# Altium PCB MCU_BMA_V1_0.PcbDoc
Units mm, origin at the board's own origin, x right, y up, seen from the top; angles counter-clockwise.
Board outline 47 x 47 mm, 2 copper layers (Top Layer, Bottom Layer), stack 1.571 mm thick; 35 components, 29 nets, 190 pads, 60 vias.
Unrouted connection lines stored in the file: 46.
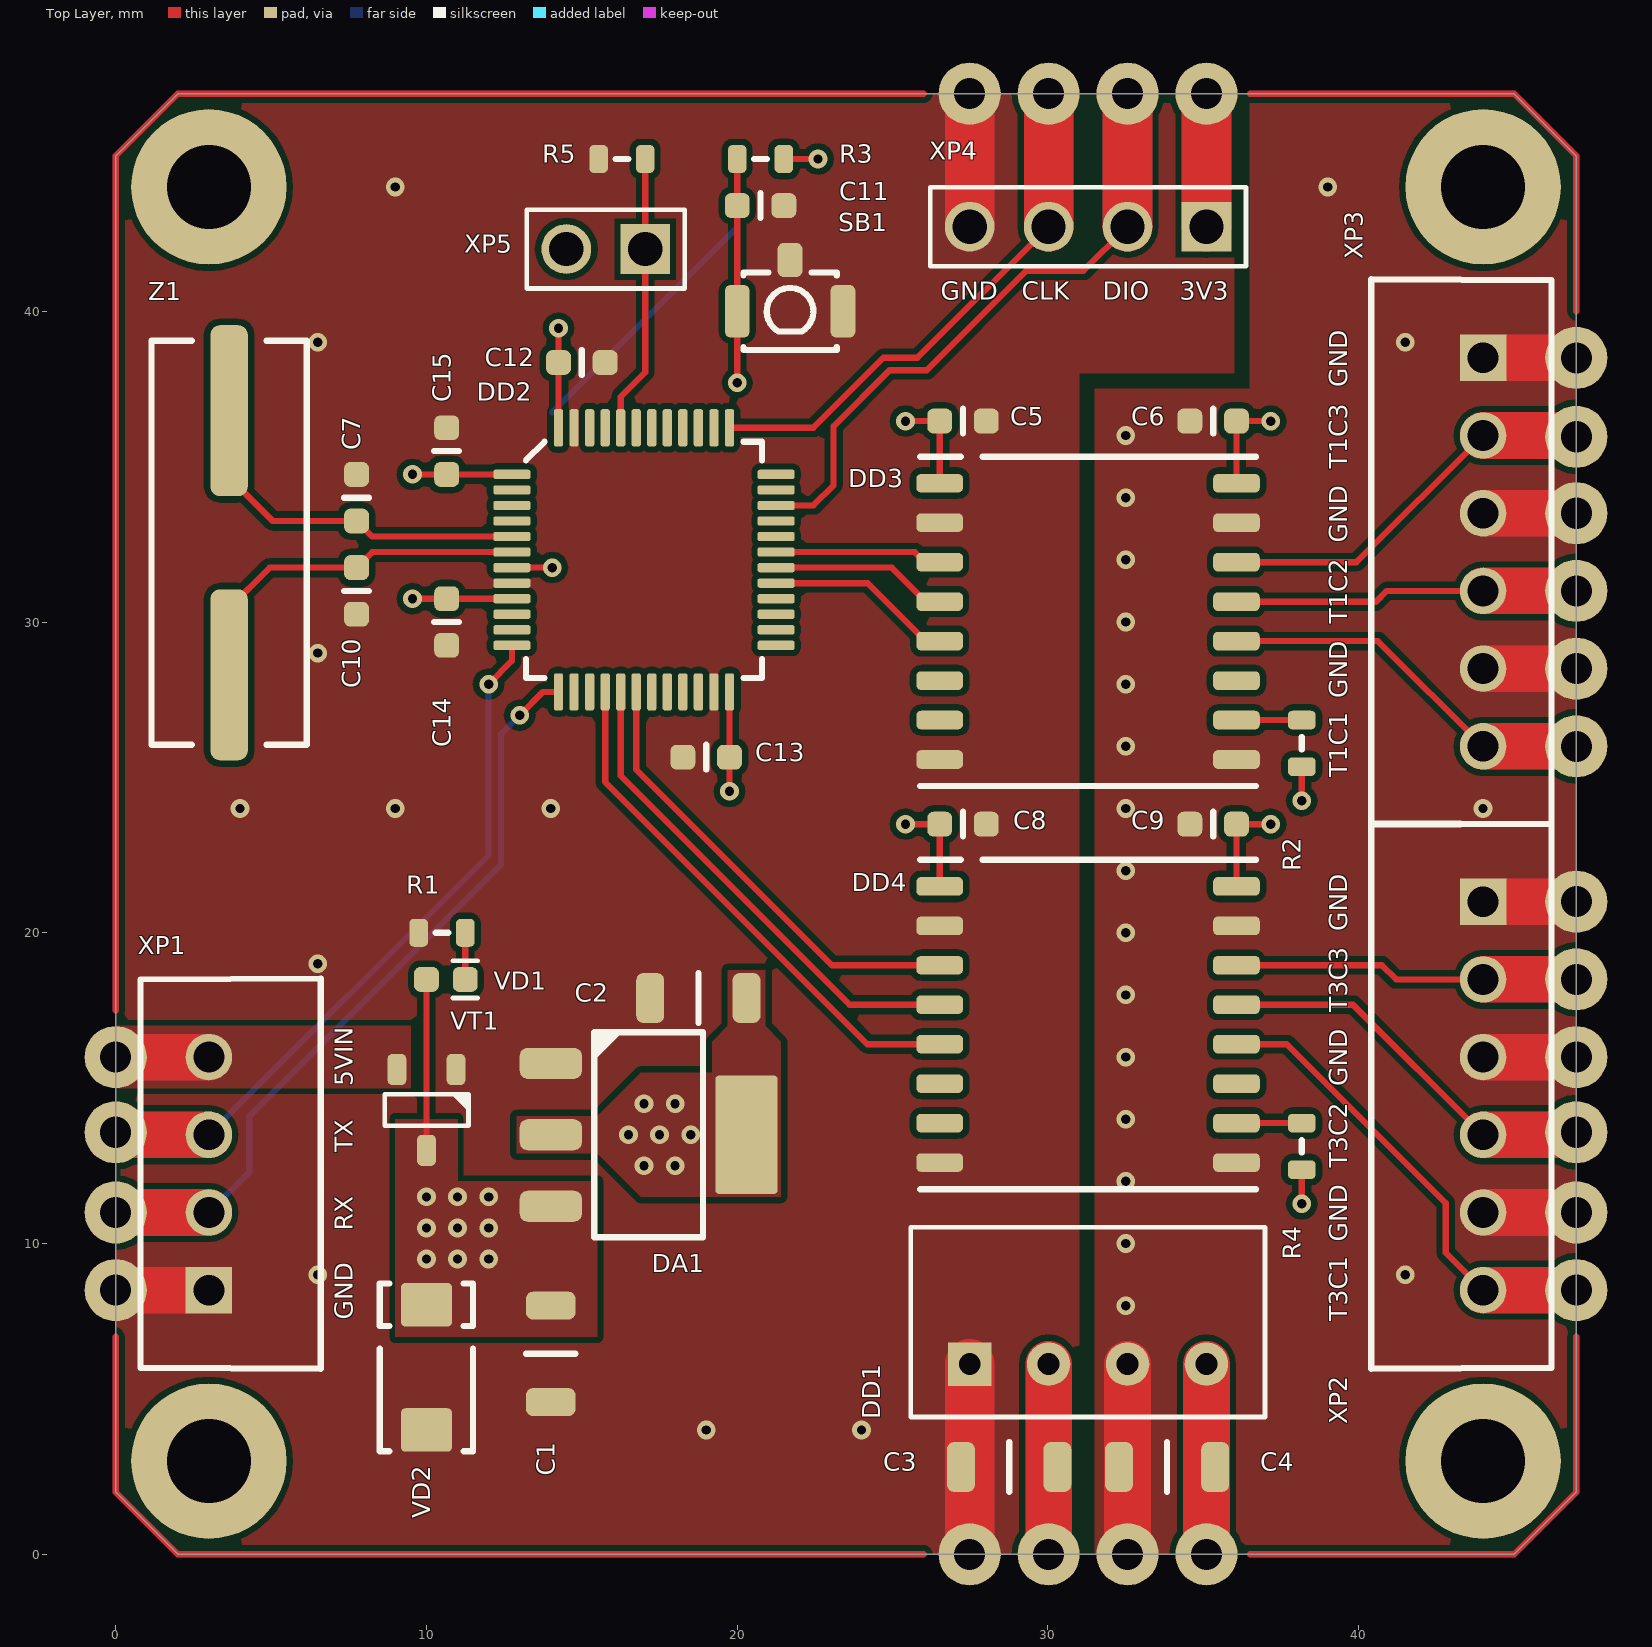
[diagram p0: Top Layer view]
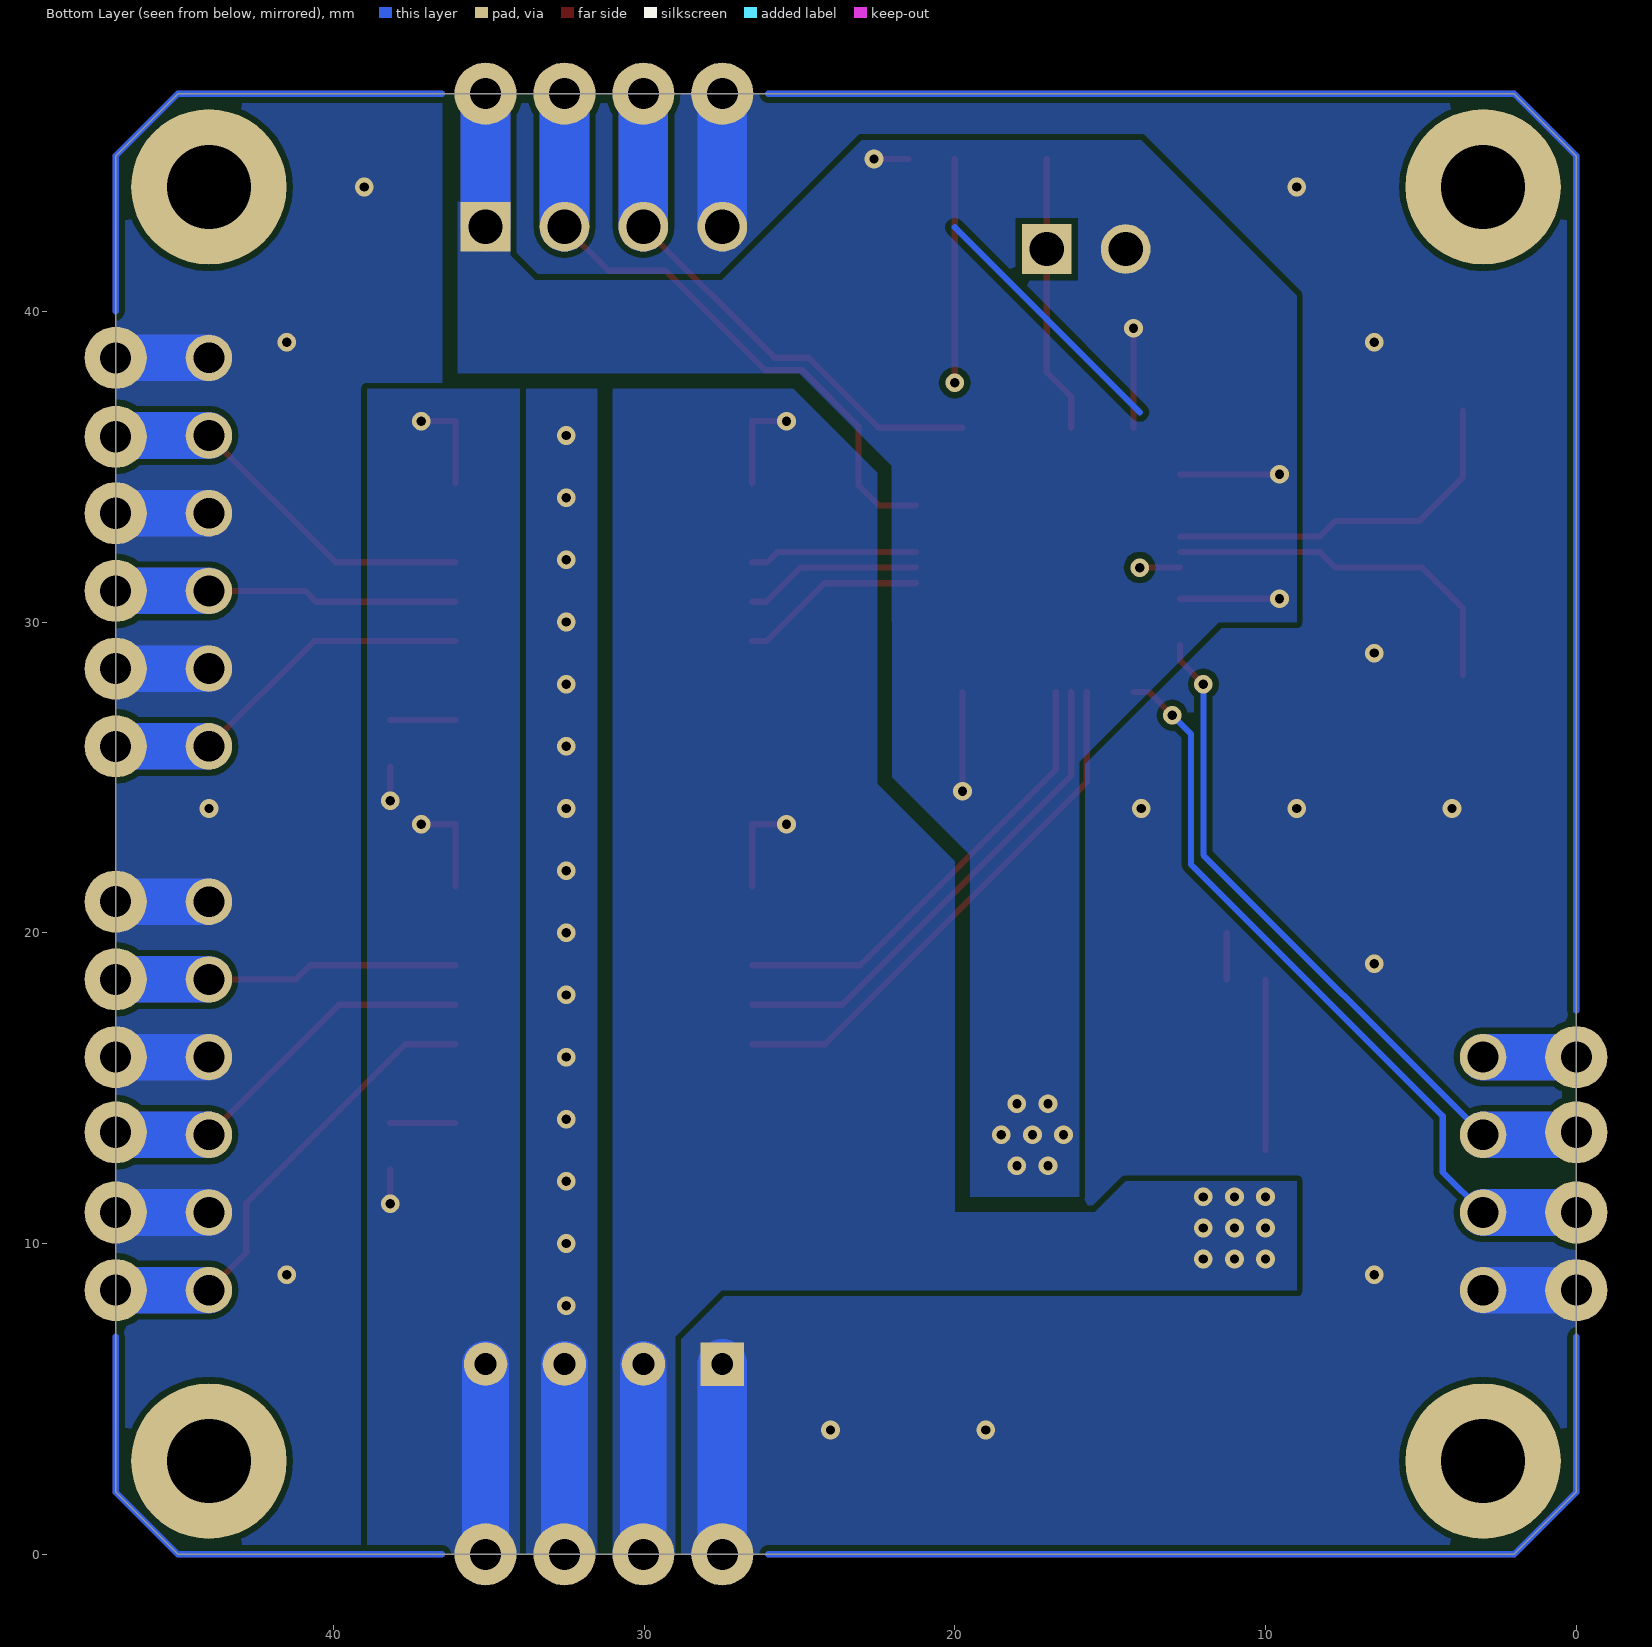
[diagram p1: Bottom Layer view, seen from below]

## Layer stack, top to bottom
Top Solder: solder mask 0.0102, Solder Resist, Dk 3.5
Top Layer: signal copper 0.0356
Dielectric 1: core 1.5, FR4, Dk 4.6
Bottom Layer: signal copper 0.0356
Bottom Solder: solder mask 0.0102, Solder Resist, Dk 3.5

## Board outline
0,2 0,45 2,47 45,47 47,45 47,2 45,0 2,0

## Design rules (kind name [scope] priority, off if disabled: settings)
Clearance [All] p1: gap=0.2 ignorepadtopadclearanceinfootprint=FALSE except(0: Arc-Hole Track-Hole SMDPad-Hole THPad-Hole Via-Hole Fill-Hole Poly-Hole Region-Hole Text-Hole)
ComponentClearance [All] p1: gap=0 collisioncheckmode=3 verticalgap=0 showdistances=FALSE
PlaneConnect [All] p1: planeconnectstyle=Direct reliefexpansion=0.508 reliefentries=4 reliefconductorwidth=0.254 reliefairgap=0.254
PolygonConnect [All] p1: connectstyle=Direct reliefconductorwidth=0.254 reliefentries=4 polygonreliefangle="90 Angle" airgapwidth=0.254
RoomDefinition main [InComponentClass('main')] p1 off: confinementstyle=ConfineIn formatcopy=TRUE lockcomponents=FALSE outline 77.943,-13.949 246.853,-13.949 246.853,3.069 77.943,3.069
RoutingVias [All] p1: holewidth=0.3 width=0.6 viastyle="Through Hole" minholewidth=0.3 minwidth=0.6 maxholewidth=1 maxwidth=2
SolderMaskExpansion [All] p1: expansion=0.102 istentingtop=FALSE
Width [All] p1: maxlimit=10 minlimit=0.2 preferedwidth=0.2
28 further rules are at their usual default settings.

## Components (designator, comment, footprint, x,y, rotation, side; value= is the part's Value field where it differs from the comment)
C1 "10 мкФ" C1206C 14,6.45 r270 top
C2 "10 мкФ" C1206C 18.75,17.9 r180 top
C3 "10 мкФ" C1206C 28.75,2.81 r180 top
C4 "10 мкФ" C1206C 33.83,2.81 r180 top
C5 "0,1 мкФ" C0603C 27.265,36.465 r0 top
C6 "0,1 мкФ" C0603C 35.315,36.465 r180 top
C7 "20 пФ" C0603C 7.75,34 r270 top
C8 "0,1 мкФ" C0603C 27.265,23.495 r0 top
C9 "0,1 мкФ" C0603C 35.315,23.495 r180 top
C10 "20 пФ" C0603C 7.75,31 r90 top
C11 "0,1 мкФ" C0603C 20.75,43.4 r0 top
C12 "0,1 мкФ" C0603C 15,38.35 r0 top
C13 "0,1 мкФ" C0603C 19,25.65 r180 top
C14 "0,1 мкФ" C0603C 10.65,30 r270 top
C15 "0,1 мкФ" C0603C 10.65,35.5 r90 top
DA1 "LD1117S33TR" SOT-223 20.3,13.5 r270 top
DD1 "TME 0505S" TME-1W-SINGLE 27.48,6.12 r0 top
DD2 "STM32F030C8T6TR" LQFP48 17,32 r0 top
DD3 "ADUM1400ARWZ-RL" SOIC-Wide-16 31.29,30.02 r0 top
DD4 "ADUM1400ARWZ-RL" SOIC-Wide-16 31.29,17.05 r0 top
R1 "130 Ом" C0603R 10.5,20 r180 top
R2 "10 кОм" C0603R 38.165,26.095 r270 top
R3 "10 кОм" C0603R 20.75,44.9 r180 top
R4 "10 кОм" C0603R 38.165,13.125 r270 top
R5 "10 кОм" C0603R 16.29,44.9 r0 top
SB1 "B3U-1100PB" B3U-1100P 21.7,40 r180 top
VD1 "KPH-1608SGC" LED_0603 10.625,18.5 r180 top
VD2 "SMAJ5.0A" DO-214AC 10,6.015 r270 top
VT1 "IRLML2244TRPBF" SOT23-3 10,14.3 r180 top
XP1 "DS1069-4 M" "DS1069-4 M" 3,8.5 r90 top
XP2 "DS1069-6 M" "DS1069-6 M" 44,21 r270 top
XP3 "DS1069-6 M" "DS1069-6 M" 44,38.5 r270 top
XP4 "PLS-4" PLS-4 31.29,42.72 r180 top
XP5 "PLS-2" PLS-2 15.77,42 r180 top
Z1 "8 МГц" HC-49SM 3.65,32.55 r90 top

## Footprints (in the part's own frame and the unit in brackets; to place one, negate y for a bottom-side part, rotate by r counter-clockwise, add the part's x,y. Pads: shape width x height; smd on the part's side, far side on the other; paste and mask are expansions set on the pad)
B3U-1100P [mm]
  rrect50% 0.8x1.7 smd: 1(-1.7,0) 2(1.7,0)
  rrect50% 0.8x1.1 smd: 3(0,-1.65)
  silkscreen extent -1.5,-1.25 1.5,1.25, body extent -2,-1.95 2,1.25, height 1.75
C0603C [mm]
  rrect50% 0.8x0.8 smd: 1(-0.75,0) 2(0.75,0)
  silkscreen extent 0,-0.4 0,0.4, body extent -0.8,-0.4 0.8,0.4, height 0.95
C0603R [mm]
  rrect50% 0.6x0.9 smd: 1(-0.75,0) 2(0.75,0)
  silkscreen extent -0.2,0 0.2,0, body extent -0.8,-0.4 0.8,0.4, height 0.44
C1206C [mm]
  rrect50% 0.9x1.6 smd: 1(-1.55,0) 2(1.55,0)
  silkscreen extent 0,-0.8 0,0.8, body extent -1.6,-0.8 1.6,0.8, height 1.3
DO-214AC [mm]
  rrect20% 1.4x1.64 smd: 1(-2.015,0) 2(2.015,0)
  silkscreen extent -2.7,-1.5 2.7,1.5, body extent -2.6,-1.36 2.6,1.36, height 2.7
"DS1069-4 M" [mil]
  rect 59x59 / inner round 59 / far side round 59 hole 39: 1(0,0)
  round 59 hole 39: 2(98.43,0) 3(196.85,0) 4(295.28,0)
  silkscreen extent -99,-142 395,87, body extent -94,-140 394,87, height 276
"DS1069-6 M" [mil]
  rect 59x59 / inner round 59 / far side round 59 hole 39: 1(0,0)
  round 59 hole 39: 2(98.43,0) 3(196.85,0) 4(295.28,0) 5(393.7,0) 6(492.13,0)
  silkscreen extent -99,-142 592,87, body extent -98,-140 591,87, height 276
HC-49SM [mm]
  rrect50% 5.5x1.2 smd: 1(-4.25,0) 2(4.25,0)
  silkscreen extent -6.5,-2.5 6.5,2.5, body extent -6.4,-2.41 6.4,2.42, height 4.3
LED_0603 [mm]
  rrect50% 0.8x0.8 smd: 1(-0.625,0) 2(0.625,0)
  silkscreen extent -1.03,-0.6 -0.22,0.6, body extent -0.8,-0.4 0.8,0.4, height 1.1
LQFP48 [mm]
  rrect50% 1.2x0.3 smd: 1(-4.25,2.75) 2(-4.25,2.25) 3(-4.25,1.75) 4(-4.25,1.25) 5(-4.25,0.75) 6(-4.25,0.25) 7(-4.25,-0.25) 8(-4.25,-0.75) 9(-4.25,-1.25) 10(-4.25,-1.75) 11(-4.25,-2.25) 12(-4.25,-2.75) 25(4.25,-2.75) 26(4.25,-2.25) 27(4.25,-1.75) 28(4.25,-1.25) 29(4.25,-0.75) 30(4.25,-0.25) 31(4.25,0.25) 32(4.25,0.75) 33(4.25,1.25) 34(4.25,1.75) 35(4.25,2.25) 36(4.25,2.75)
  rrect50% 0.3x1.2 smd: 13(-2.75,-4.25) 14(-2.25,-4.25) 15(-1.75,-4.25) 16(-1.25,-4.25) 17(-0.75,-4.25) 18(-0.25,-4.25) 19(0.25,-4.25) 20(0.75,-4.25) 21(1.25,-4.25) 22(1.75,-4.25) 23(2.25,-4.25) 24(2.75,-4.25) 37(2.75,4.25) 38(2.25,4.25) 39(1.75,4.25) 40(1.25,4.25) 41(0.75,4.25) 42(0.25,4.25) 43(-0.25,4.25) 44(-0.75,4.25) 45(-1.25,4.25) 46(-1.75,4.25) 47(-2.25,4.25) 48(-2.75,4.25)
  silkscreen extent -3.8,-3.8 3.8,3.8, body extent -4.5,-4.51 4.5,4.49, height 1.56
PLS-2 [mm]
  rect 1.6x1.6 hole 1.1: 1(-1.27,0)
  round 1.6 hole 1.1: 2(1.27,0)
  silkscreen extent -2.54,-1.27 2.54,1.27, body extent -2.54,-1.27 2.54,1.27, height 8.5
PLS-4 [mm]
  rect 1.6x1.6 hole 1.1: 1(-3.81,0)
  round 1.6 hole 1.1: 2(-1.27,0) 3(1.27,0) 4(3.81,0)
  silkscreen extent -5.08,-1.27 5.08,1.27, body extent -5.08,-1.27 5.08,1.27, height 8.5
SOIC-Wide-16 [mm]
  rrect50% 1.5x0.6 smd: 1(-4.775,4.445) 2(-4.775,3.175) 3(-4.775,1.905) 4(-4.775,0.635) 5(-4.775,-0.635) 6(-4.775,-1.905) 7(-4.775,-3.175) 8(-4.775,-4.445) 9(4.775,-4.445) 10(4.775,-3.175) 11(4.775,-1.905) 12(4.775,-0.635) 13(4.775,0.635) 14(4.775,1.905) 15(4.775,3.175) 16(4.775,4.445)
  silkscreen extent -5.4,-5.3 5.4,5.3, body extent -5.15,-5.15 5.15,5.15, height 2.65
SOT23-3 [mm]
  rrect50% 0.6x1 smd: 1(-0.95,-1.3) 2(0.95,-1.3) 3(0,1.3)
  silkscreen extent -1.35,-0.51 1.35,0.51, body extent -1.45,-1.24 1.45,1.25, height 1.09
SOT-223 [mm]
  rrect50% 1x2 smd: 1(-2.3,-6.3) 2(0,-6.3) 3(2.3,-6.3)
  rrect10% 3.8x2 smd: 4(0,0)
  silkscreen extent -3.3,-4.9 3.3,-1.4, body extent -3.25,-6.6 3.25,0.4, height 1.8
TME-1W-SINGLE [mm]
  rect 1.4x1.4 hole 0.7: 1(0,0)
  round 1.4 hole 0.7: 2(2.54,0) 3(5.08,0) 4(7.62,0)
  silkscreen extent -1.9,-1.7 9.5,4.4, body extent -1.89,-1.68 9.51,4.32, height 10

## Part data
C1 C2 C3 C4: library part CC1206KKX7R8BB106, "SMD 1206; X7R; 10 мкФ; 25 В", Dielectric=X7R, Manufacturer=YAGEO, Package="SMD 1206", Voltage="25 В", ComponentLink1Description=Datasheet, Part Number=CC1206KKX7R8BB106, Persent=±15%, Type=Ceramic
C5 C6 C8 C9 C11 C12 C13 C14 C15: library part CC0603KRX7R9BB104, "SMD 0603 ; X7R; 0,1 мкФ; 50 В", Dielectric=X7R, Manufacturer=YAGEO, Package="SMD 0603", Voltage="50 В", ComponentLink1Description=Datasheet, Part Number=CC0603KRX7R9BB104, Persent=±5%, Type=Ceramic
C7 C10: library part CC0603JRNPO9BN200, "SMD 0603 ; C0G(NP0); 20 пФ; 50 В", Dielectric=C0G(NP0), Manufacturer=YAGEO, Package="SMD 0603", Voltage="50 В", ComponentLink1Description=Datasheet, Part Number=CC0603JRNPO9BN200, Persent=±15%, Type=Ceramic
DA1: "Linear regulator, 3V3", Manufacturer=STMicroelectronics, Part Number=LD1117S33TR, Type="Linear regulator"
DD1: "Switching regulator, 5V", Manufacturer="Traco Power", Part Number="TME 0505S", Type="ISO DC/DC"
DD2: Manufacturer=STMicroelectronics, Part Number=STM32F030C8T6TR, Type=MCU
DD3 DD4: "ISO", Manufacturer="Analog Devices", Part Number=ADUM1400ARWZ-RL, Type=ISO
R1: library part RC0603FR-07130RL, "SMD 0603; 0,1; 1%; 130 Ом", Manufacturer=Yageo, Package="SMD 0603", Power=0,1, Category=R, Part Number=RC0603FR-07130RL, Persent=1%
R2 R3 R4 R5: library part RC0603FR-0710KL, "SMD 0603; 0,1; 1%; 10 кОм", Manufacturer=Yageo, Package="SMD 0603", Power=0,1, Category=R, Part Number=RC0603FR-0710KL, Persent=1%
SB1: "SB", Manufacturer=OMRON, Part Number=B3U-1100PB, Type=SB
VD1: "0603 LED GREEN 10 ucd", Manufacturer=Kingbright, Part Number=KPH-1608SGC, Type=LED
VD2: "TVS 5 В", Manufacturer=BOURNS, Power=400W, Voltage=5V, Part Number=SMAJ5.0A, Type=TVS
VT1: "P MOSFET", Manufacturer=Infineon, Part Number=IRLML2244TRPBF, Type=MOSFET, Сharacter=P
XP1 XP2 XP3: Manufacturer=Connfly
  XP1: Part Number="DS1069-4 M"
  XP2 XP3: Part Number="DS1069-6 M"
XP4 XP5: Manufacturer=-, ComponentLink1Description=Datasheet, Type=PLS
  XP4: Part Number=PLS-4
  XP5: Part Number=PLS-2
Z1: library part 8.000MHzHC-49SM, "8.000MHzHC-49SM", Manufacturer=-, ComponentLink1Description=Datasheet, Part Number=8.000MHzHC-49SM, Type=Quartz

## Free pads (board coordinates)
  round 2 hole 1: 0(0,8.5) 0(0,11) 0(0,13.58) 0(0,16) 0(27.48,0) 0(27.48,47) 0(30.02,0) 0(30.02,47) 0(32.56,0) 0(32.56,47) 0(35.1,0) 0(35.1,47) 0(47,8.5) 0(47,11) 0(47,13.58) 0(47,16) 0(47,18.5) 0(47,21) 0(47,26) 0(47,28.5) 0(47,31) 0(47,33.5) 0(47,35.96) 0(47,38.5)
  round 5 hole 2.7: 0(3,3) 0(3,44) 0(44,3) 0(44,44)

## Via types
v1: diameter 0.6, hole 0.3, Top Layer to Bottom Layer, tented both sides, 60 vias

## Nets (pads, with @x,y where several pads share a name; then routed paths per layer and width w, separated by ;. In a path a pad name is that pad's centre, name@x,y a point inside that pad or via, vN(x,y) a via of type N, cw(c..) or ccw(c..) an arc to the next point about the centre after c; other vN are vias at no path point)
3V3: C2.1 C12.1 C13.1 C14.1 C15.1 DA1.2 DA1.4 DD2.1 DD2.9 DD2.24 DD2.48 pad.0@35.1,47 R3.1 XP4.1 XP5.2 | length 22.5
  Top Layer w0.2: v1(9.55,30.75) C14.1 DD2.9 ; v1(9.55,34.75) C15.1 DD2.1 ; DD2.48 C12.1 v1(14.25,39.45) ; v1(19.75,24.55) C13.1 DD2.24 ; R3.1 v1(22.6,44.9)
  Top Layer w1.6: XP4.1 pad.0@35.1,47
  Bottom Layer w1.6: XP4.1 pad.0@35.1,47
  other v1: 17,12.5 18,12.5 16.5,13.5 17.5,13.5 18.5,13.5 17,14.5 18,14.5
5V: C1.1 C3.1 C5.1 C8.1 DA1.3 DD1.2 DD3.1 DD4.1 pad.0@30.02,0 VD1.2 VD2.1 VT1.3 | length 23.9
  Top Layer w0.2: VT1.3 VD1.2 ; v1(25.415,23.495) C8.1 DD4.1 ; v1(25.415,36.465) C5.1 DD3.1
  Top Layer w1.5: pad.0@30.02,0 DD1.2
  Bottom Layer w1.5: pad.0@30.02,0 DD1.2
  other v1: 10,9.5 11,9.5 12,9.5 10,10.5 11,10.5 12,10.5 10,11.5 11,11.5 12,11.5
5V_P: C4.1 C6.1 C9.1 DD1.4 DD3.16 DD4.16 pad.0@35.1,0 R2.2 R4.2 | length 20.6
  Top Layer w0.2: DD4.16 C9.1 v1(37.165,23.495) ; DD3.16 C6.1 v1(37.165,36.465) ; v1(38.165,11.275) R4.2 ; v1(38.165,24.245) R2.2
  Top Layer w1.5: pad.0@35.1,0 DD1.4
  Bottom Layer w1.5: pad.0@35.1,0 DD1.4
DGND: C1.2 C2.2 C3.2 C5.2 C7.1 C8.2 C10.1 C11.2 C12.2 C13.2 C14.2 C15.2 DA1.1 DD1.1 DD2.8 DD2.23 DD2.47 DD3.2 DD3.8 DD4.2 DD4.8 pad.0@0,8.5 pad.0@27.48,0 pad.0@27.48,47 R1.2 R5.1 SB1.1 SB1.3 VD2.2 VT1.1 XP1.1 XP4.4 | length 26.8
  Top Layer w1.5: pad.0@0,8.5 XP1.1
  Top Layer w1.6: pad.0@27.48,0 DD1.1 ; XP4.4 pad.0@27.48,47
  Bottom Layer w1.5: pad.0@0,8.5 XP1.1
  Bottom Layer w1.6: pad.0@27.48,0 DD1.1 ; XP4.4 pad.0@27.48,47
  other v1: 19,4 24,4 6.5,9 6.5,19 4,24 9,24 14,24 6.5,29 6.5,39 9,44
NetC7_2: C7.2 DD2.5 Z1.2 | length 12
  Top Layer w0.2: Z1.2 3.65,34.65 5.05,33.25 C7.2 8.25,32.75 DD2.5
NetC10_2: C10.2 DD2.6 Z1.1 | length 12
  Top Layer w0.2: Z1.1 3.65,30.45 4.95,31.75 C10.2 8.25,32.25 DD2.6
NetC11_1: C11.1 DD2.7 R3.2 SB1.2 | length 16.9
  Top Layer w0.2: DD2.7 v1(14.05,31.75) ; v1(20,37.7) SB1.2 C11.1 R3.2
  Bottom Layer w0.2: 14.05,36.75 20,42.7
NetDD2_44: DD2.44 R5.2 XP5.1 | length 9
  Top Layer w0.2: DD2.44 16.25,37.25 17.04,38.04 XP5.1 R5.2
NetDD3_10: DD3.10 R2.1 | length 2.1
  Top Layer w0.2: DD3.10 R2.1
NetDD4_10: DD4.10 R4.1 | length 2.1
  Top Layer w0.2: DD4.10 R4.1
NetR1_1: R1.1 VD1.1 | length 1.5
  Top Layer w0.2: VD1.1 R1.1
PGND: C4.2 C6.2 C9.2 DD1.3 DD3.9 DD3.15 DD4.9 DD4.15 pad.0@32.56,0 pad.0@47,11 pad.0@47,16 pad.0@47,21 pad.0@47,28.5 pad.0@47,33.5 pad.0@47,38.5 XP2.1 XP2.3 XP2.5 XP3.1 XP3.3 XP3.5 | length 48.2
  Top Layer w1.5: pad.0@32.56,0 DD1.3 ; XP2.5 pad.0@47,11 ; XP2.3 pad.0@47,16 ; XP2.1 pad.0@47,21 ; XP3.5 pad.0@47,28.5 ; XP3.3 pad.0@47,33.5 ; XP3.1 pad.0@47,38.5
  Bottom Layer w1.5: pad.0@32.56,0 DD1.3 ; XP2.5 pad.0@47,11 ; XP2.3 pad.0@47,16 ; XP2.1 pad.0@47,21 ; XP3.5 pad.0@47,28.5 ; XP3.3 pad.0@47,33.5 ; XP3.1 pad.0@47,38.5
  other v1: 32.5,8 41.5,9 32.5,10 32.5,12 32.5,14 32.5,16 32.5,18 32.5,20 32.5,22 32.5,24 44,24 32.5,26 32.5,28 32.5,30 32.5,32 32.5,34 32.5,36 41.5,39 39,44
SWCLK: DD2.37 pad.0@30.02,47 XP4.3 | length 21.5
  Top Layer w0.2: DD2.37 22.45,36.25 24.7,38.5 25.8,38.5 XP4.3
  Top Layer w1.6: XP4.3 pad.0@30.02,47
  Bottom Layer w1.6: XP4.3 pad.0@30.02,47
SWDIO: DD2.34 pad.0@32.56,47 XP4.2 | length 24.7
  Top Layer w0.2: DD2.34 22.45,33.75 23.1,34.4 23.1,36.3 24.9,38.1 26.1,38.1 29.303,41.303 ; 29.303,41.3 31.14,41.3 XP4.2
  Top Layer w1.6: XP4.2 pad.0@32.56,47
  Bottom Layer w1.6: XP4.2 pad.0@32.56,47
TIM1_CH1: DD2.29 DD3.5 | length 6
  Top Layer w0.2: DD2.29 24.2,31.25 26.065,29.385 DD3.5
TIM1_CH1_ISO: DD3.12 pad.0@47,26 XP3.6 | length 15.3
  Top Layer w0.2: DD3.12 40.615,29.385 XP3.6
  Top Layer w1.5: XP3.6 pad.0@47,26
  Bottom Layer w1.5: XP3.6 pad.0@47,26
TIM1_CH2: DD2.30 DD3.4 | length 5.7
  Top Layer w0.2: DD2.30 24.97,31.75 26.065,30.655 DD3.4
TIM1_CH2_ISO: DD3.13 pad.0@47,31 XP3.4 | length 14.1
  Top Layer w0.2: DD3.13 40.555,30.655 40.9,31 XP3.4
  Top Layer w1.5: XP3.4 pad.0@47,31
  Bottom Layer w1.5: XP3.4 pad.0@47,31
TIM1_CH3: DD2.31 DD3.3 | length 5.4
  Top Layer w0.2: DD2.31 25.713,32.25 26.038,31.925 DD3.3
TIM1_CH3_ISO: DD3.14 pad.0@47,35.96 XP3.2 | length 15.7
  Top Layer w0.2: DD3.14 39.925,31.925 XP3.2
  Top Layer w1.5: XP3.2 46.96,36 pad.0@47,35.96
  Bottom Layer w1.5: XP3.2 46.96,36 pad.0@47,35.96
TIM3_CH1: DD2.16 DD4.5 | length 17.2
  Top Layer w0.2: DD2.16 15.75,24.85 24.185,16.415 DD4.5
TIM3_CH1_ISO: DD4.12 pad.0@47,8.5 XP2.6 | length 18.2
  Top Layer w0.2: DD4.12 37.685,16.415 42.8,11.3 42.8,9.7 XP2.6
  Top Layer w1.5: XP2.6 pad.0@47,8.5
  Bottom Layer w1.5: XP2.6 pad.0@47,8.5
TIM3_CH2: DD2.17 DD4.4 | length 16
  Top Layer w0.2: DD2.17 16.25,25.05 23.615,17.685 DD4.4
TIM3_CH2_ISO: DD4.13 pad.0@47,13.58 XP2.4 | length 15.7
  Top Layer w0.2: DD4.13 39.815,17.685 XP2.4
  Top Layer w1.5: XP2.4 46.92,13.5 pad.0@47,13.58
  Bottom Layer w1.5: XP2.4 46.92,13.5 pad.0@47,13.58
TIM3_CH3: DD2.18 DD4.3 | length 14.9
  Top Layer w0.2: DD2.18 16.75,25.25 23.045,18.955 DD4.3
TIM3_CH3_ISO: DD4.14 pad.0@47,18.5 XP2.2 | length 14.1
  Top Layer w0.2: DD4.14 40.745,18.955 41.2,18.5 XP2.2
  Top Layer w1.5: XP2.2 pad.0@47,18.5
  Bottom Layer w1.5: XP2.2 pad.0@47,18.5
UART2_RX: DD2.13 pad.0@0,11 XP1.2 | length 27.7
  Top Layer w0.2: v1(13,27) 13.75,27.75 DD2.13
  Top Layer w1.5: pad.0@0,11 XP1.2
  Bottom Layer w0.2: XP1.2 4.3,12.3 4.3,14.1 12.4,22.2 12.4,26.4 v1(13,27)
  Bottom Layer w1.5: pad.0@0,11 XP1.2
UART2_TX: DD2.12 pad.0@0,13.58 XP1.3 | length 25.6
  Top Layer w0.2: v1(12,28) 12.75,28.75 DD2.12
  Top Layer w1.5: pad.0@0.08,13.5 XP1.3
  Bottom Layer w0.2: XP1.3 12,22.5 v1(12,28)
  Bottom Layer w1.5: pad.0@0.08,13.5 XP1.3
VIN: pad.0@0,16 VT1.2 XP1.4 | length 6
  Top Layer w1.5: pad.0@0,16 XP1.4
  Bottom Layer w1.5: pad.0@0,16 XP1.4
pads on no net: DD2.2 DD2.3 DD2.4 DD2.10 DD2.11 DD2.14 DD2.15 DD2.19 DD2.20 DD2.21 DD2.22 DD2.25 DD2.26 DD2.27 DD2.28 DD2.32 DD2.33 DD2.35 DD2.36 DD2.38 DD2.39 DD2.40 DD2.41 DD2.42 DD2.43 DD2.45 DD2.46 DD3.6 DD3.7 DD3.11 DD4.6 DD4.7 DD4.11

## Polygon pours and split planes (outlines as drawn)
5V on Bottom Layer "NONET_L-01_P-001" (solid, remove dead copper, pour order 6): 9,12 14.5,12 15.5,11 20,11 20,22.3 22.5,24.8 22.5,34.8 25.2,37.5 31,37.5 31,0 29,0 29,7 27.5,8.5 9,8.5
DGND on Bottom Layer "NONET_L-01_P-001" (solid, remove dead copper, pour order 9): 29,0 29,7 27.5,8.5 9,8.5 9,10.5 16.5,10.5 16.5,25.5 11.5,30.5 9.5,30.5 9.5,40 15,45.5 21.5,45.5 26.5,40.5 36,40.5 36,47 0,47 0,0
PGND on Bottom Layer "NONET_L-01_P-001" (solid, remove dead copper, pour order 8): 47,47 36.5,47 36.5,37.5 31.5,37.5 31.5,0 47,0
3V3 on Bottom Layer "NONET_L-01_P-001" (solid, pour order 1): 36,38 25,38 22.034,35.034 22.008,25.008 19.5,22.5 19.5,11.5 16,11.5 16,25.5 11.5,30 9,30 9,40.5 14,45.5 23,45.5 27.5,41 33.5,41 34.3,41.8 34.3,43.52 36,43.52
5V_P on Bottom Layer "NONET_L-01_P-001" (solid, remove dead copper, pour order 0): 34,37.5 38.91,37.5 38.91,0 34,0
PGND on Top Layer "NONET_L-01_P-001" (solid, remove dead copper, pour order 7): 36.5,47 47,47 47,0 31.5,0 31.5,37.5 36.5,37.5
DGND on Top Layer "NONET_L-01_P-001" (solid, remove dead copper, pour order 5): 0,0 0,47 36,47 36,38 31,38 31,0
3V3 on Top Layer "NONET_L-01_P-001" (solid, remove dead copper, pour order 4): 21.4,11.5 16.9,11.5 15.5,12.9 12.9,12.9 12.9,14.1 15.5,14.1 16.9,15.5 19.2,15.5 19.2,16.5 19.7,17 19.7,18.8 20.9,18.8 20.9,17 21.4,16.5
VIN on Top Layer "NONET_L-01_P-001" (solid, remove dead copper, pour order 3): 0,15 6.5,15 9.5,15 9.5,17 6,17 0,17
5V on Top Layer "NONET_L-01_P-001" (solid, pour order 2): 9,14 11,14 11,12 15.5,12 15.5,7 9,7

## Other copper
Multi-Layer:
  lines w0.2: 0,7 0,2 2,0 26,0 ; 0,17.5 0,45 2,47 26,47 ; 36.5,0 45,0 47,2 47,7 ; 36.5,47 45,47 47,45 47,40

## Silkscreen, mask and mechanical layers (free items; w line width, h text height)
Top Overlay:
  text "GND" at 26.554,40.18 h1
  text "CLK" at 29.154,40.18 h1
  text "DIO" at 31.76,40.18 h1
  text "3V3" at 34.244,40.184 h1
  text "GND" at 39.82,37.554 h1 r90
  text "T1C3" at 39.82,34.938 h1 r90
  text "GND" at 39.82,32.554 h1 r90
  text "T1C2" at 39.82,29.941 h1 r90
  text "GND" at 39.82,27.554 h1 r90
  text "T1C1" at 39.82,25 h1 r90
  text "GND" at 39.82,20.054 h1 r90
  text "T3C3" at 39.82,17.438 h1 r90
  text "5VIN" at 7.814,15.061 h1 r90
  text "GND" at 39.82,15.054 h1 r90
  text "TX" at 7.82,12.942 h1 r90
  text "T3C2" at 39.82,12.441 h1 r90
  text "RX" at 7.82,10.418 h1 r90
  text "GND" at 39.82,10.054 h1 r90
  text "GND" at 7.82,7.554 h1 r90
  text "T3C1" at 39.82,7.5 h1 r90
Mechanical 3:
  the board outline again, w0.2